# Altium PCB PCB1.PcbDoc (part 1 of 2)
Units mil, origin at the board's own origin, x right, y up, seen from the top; angles counter-clockwise.
Board outline 6000 x 4000 mil, 2 copper layers (Top Layer, Bottom Layer); 71 components, 119 nets, 504 pads, 94 vias.
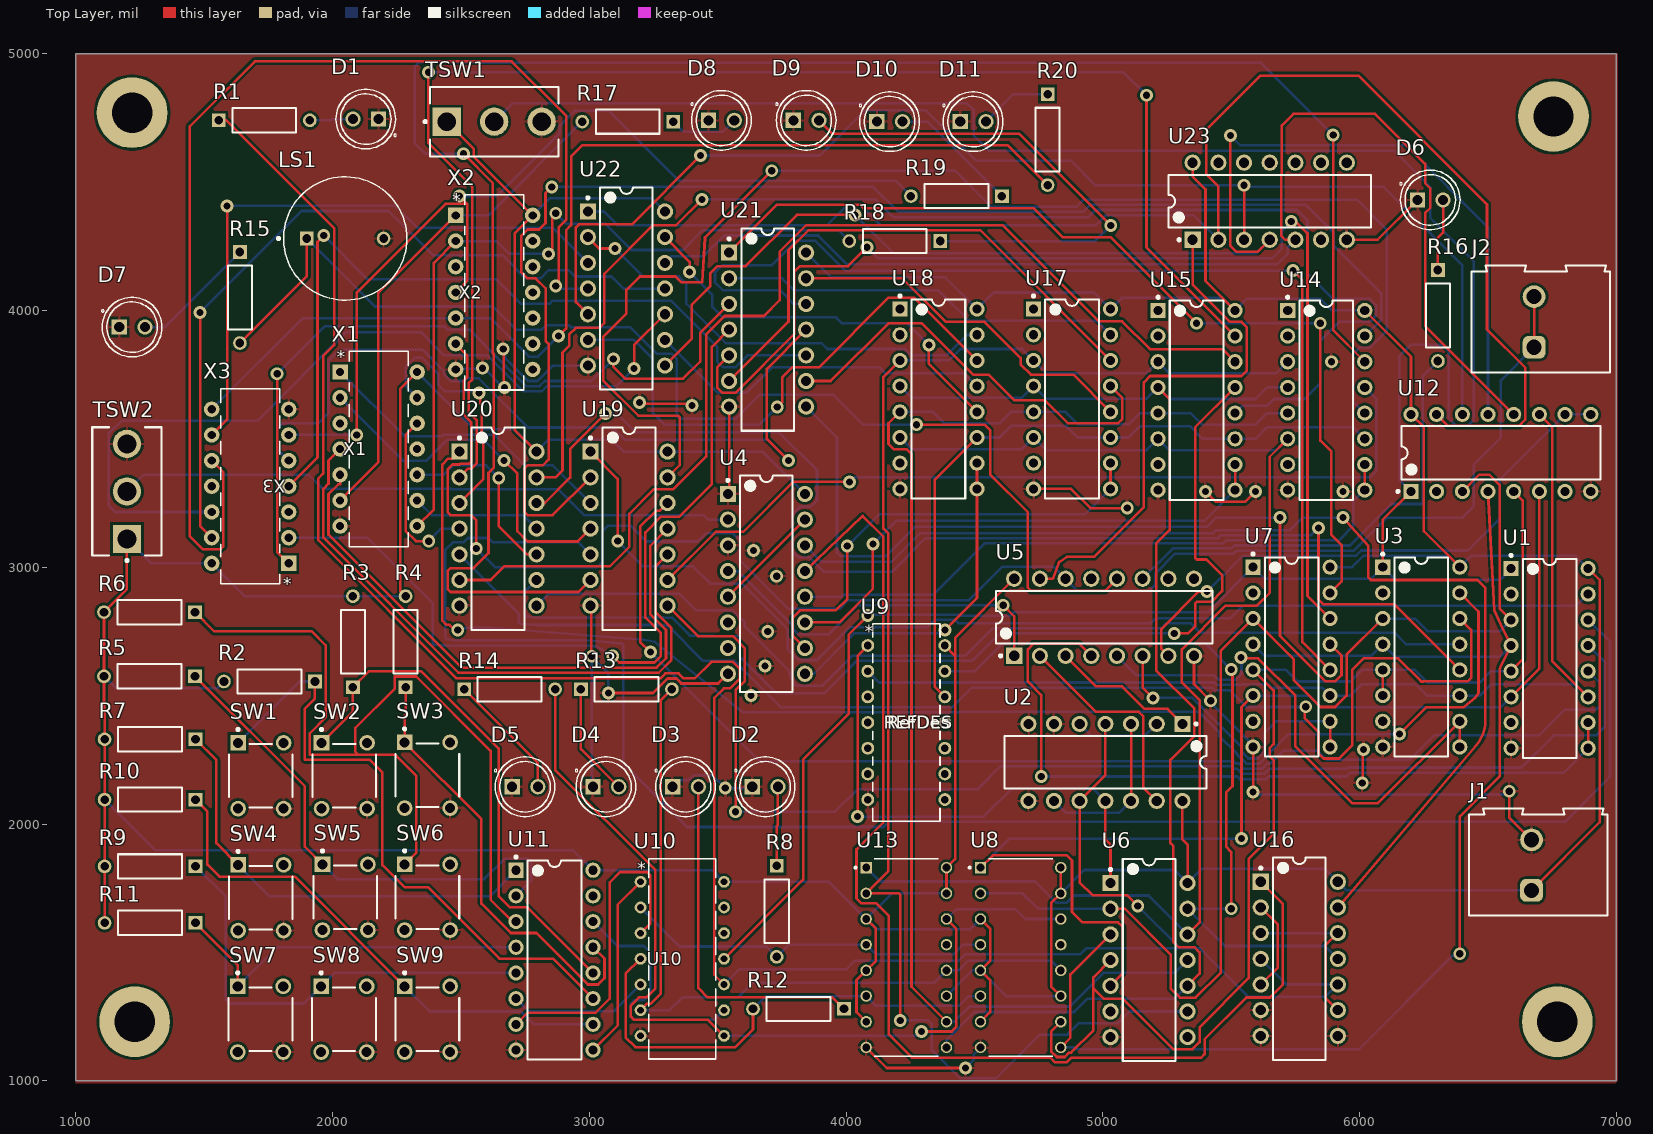
[diagram p0: Top Layer view]
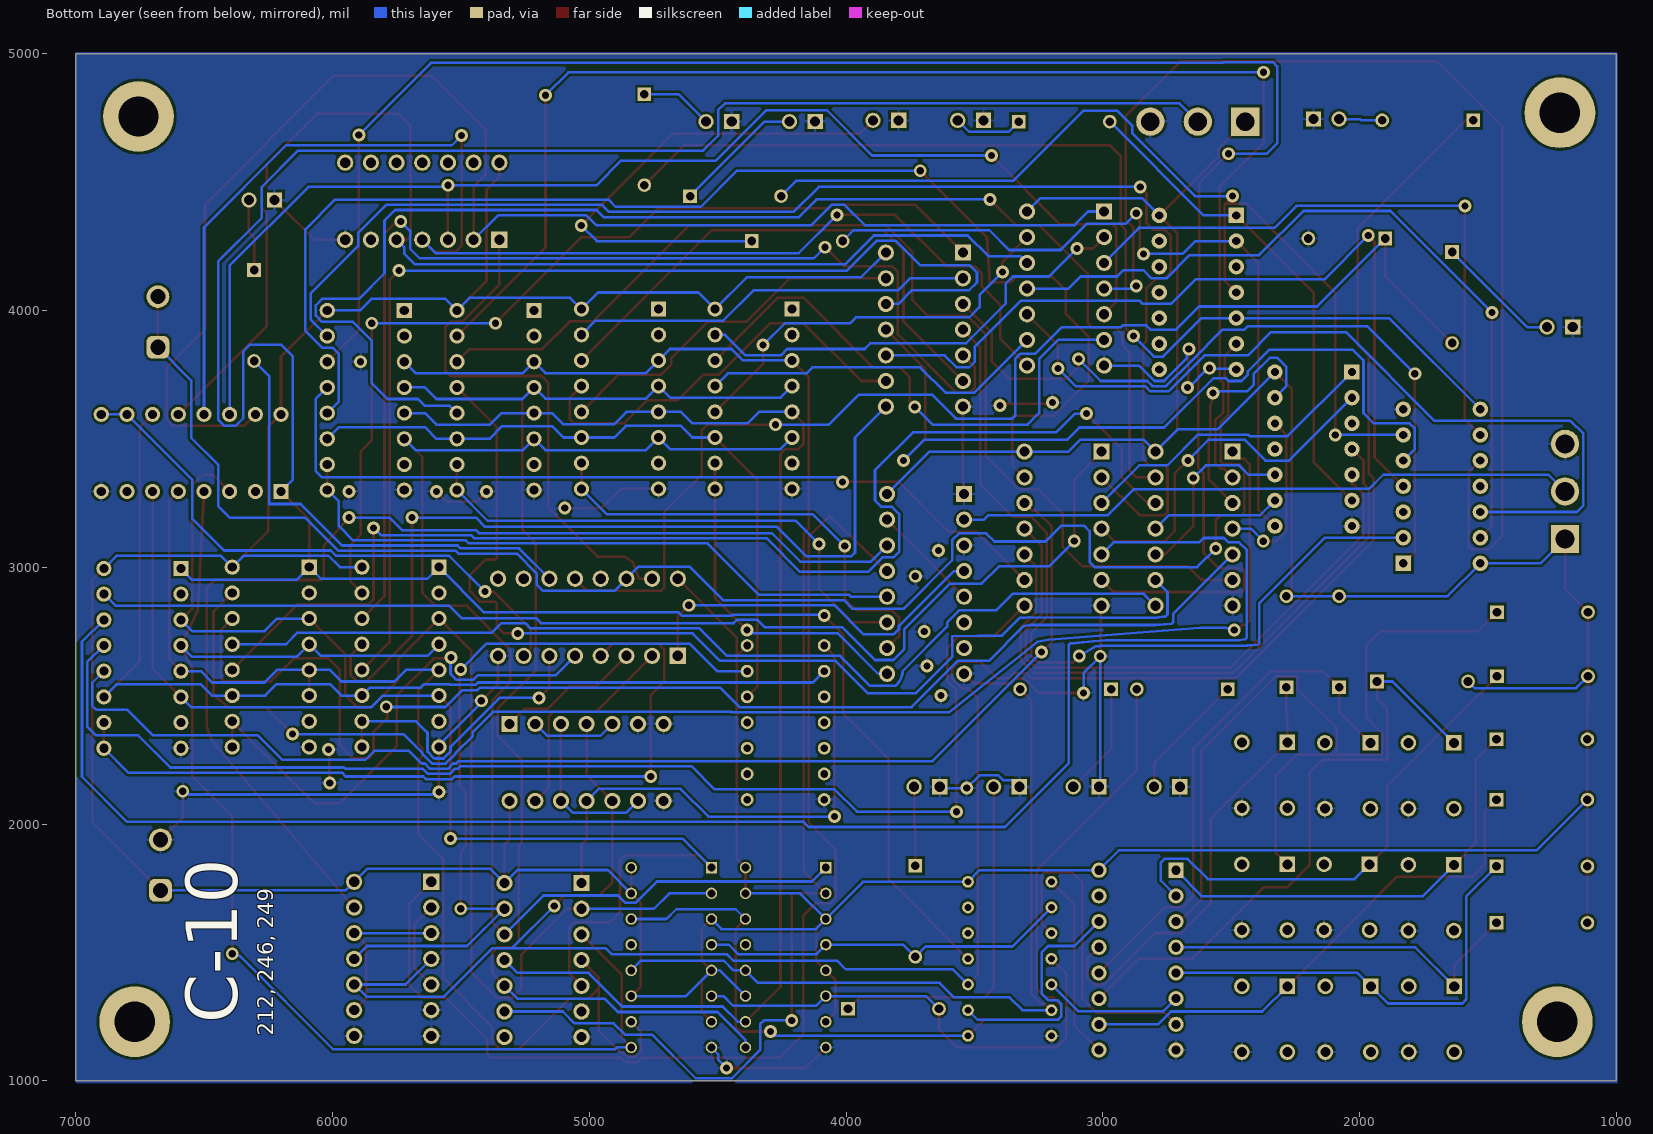
[diagram p1: Bottom Layer view, seen from below]

## Layer stack, top to bottom
Top Solder: solder mask 0.4, Solder Resist, Dk 3.5
Top Layer: signal copper 1.4
Dielectric 1: dielectric 12.6, FR-4, Dk 4.8
Bottom Layer: signal copper 1.4
Bottom Solder: solder mask 0.4, Solder Resist, Dk 3.5

## Board outline
1000,1000 7000,1000 7000,5000 1000,5000

## Design rules (kind name [scope] priority, off if disabled: settings)
Clearance [All] p1: gap=10 ignorepadtopadclearanceinfootprint=FALSE
PolygonConnect [All] p1: connectstyle=Relief reliefconductorwidth=10 reliefentries=4 polygonreliefangle="90 Angle" airgapwidth=10
RoutingVias [All] p1: holewidth=28 width=50 viastyle="Through Hole" minholewidth=28 minwidth=50 maxholewidth=28 maxwidth=50
SolderMaskExpansion [All] p1: expansion=4 istentingtop=FALSE
SupplyNets "Schematic Supply Nets_1" [InNet('+12')] p1: voltage=0.000
SupplyNets "Schematic Supply Nets" [InNet('GND')] p2: voltage=0.000
Width [All] p1: maxlimit=10 minlimit=10 preferedwidth=10
30 further rules are at their usual default settings.

## Components (designator, comment, footprint, x,y, rotation, side; value= is the part's Value field where it differs from the comment)
D1 "WP7113ID" LED_WP7113ID 2130,4745 r180 top
D2 "WP7113ID" LED_WP7113ID 3685,2145 r0 top
D3 "WP7113ID" LED_WP7113ID 3375,2145 r0 top
D4 "WP7113ID" LED_WP7113ID 3065,2145 r0 top
D5 "WP7113ID" LED_WP7113ID 2750,2145 r0 top
D6 "WP7113ID" LED_WP7113ID 6275,4430 r0 top
D7 "WP7113ID" LED_WP7113ID 1220,3935 r0 top
D8 "WP7113ID" LED_WP7113ID 3515,4740 r0 top
D9 "WP7113ID" LED_WP7113ID 3845,4740 r0 top
D10 "WP7113ID" LED_WP7113ID 4170,4735 r0 top
D11 "WP7113ID" LED_WP7113ID 4495,4735 r0 top
J1 "691211720002" 691211720002 6695,1840 r90 top
J2 "691211720002" 691211720002 6705,3955 r90 top
LS1 "AI-1223-TWT-3V-2-R" FP-AI-1223-TWT-3V-2-R-MFG 2050,4280 r0 top
R1 "MFR-25FBF52-1K" RESA60-630X240 1735,4740 r0 top
R2 "MFR-25FBF52-1K" RESA60-630X240 1755,2555 r180 top
R3 "MFR-25FBF52-1K" RESA60-630X240 2080,2710 r90 top
R4 "MFR-25FBF52-1K" RESA60-630X240 2285,2710 r90 top
R5 "MFR-25FBF52-1K" RESA60-630X240 1287.83,2575 r180 top
R6 "MFR-25FBF52-1K" RESA60-630X240 1287.83,2825 r180 top
R7 "MFR-25FBF52-1K" RESA60-630X240 1290,2330 r180 top
R8 "MFR-25FBF52-1K" RESA60-630X240 3730,1660 r270 top
R9 "MFR-25FBF52-1K" RESA60-630X240 1290,1835 r180 top
R10 "MFR-25FBF52-1K" RESA60-630X240 1290,2095 r180 top
R11 "MFR-25FBF52-1K" RESA60-630X240 1290,1615 r180 top
R12 "MFR-25FBF52-1K" RESA60-630X240 3815,1280 r180 top
R13 "MFR-25FBF52-1K" RESA60-630X240 3145,2525 r0 top
R14 "MFR-25FBF52-1K" RESA60-630X240 2690,2525 r0 top
R15 "MFR-25FBF52-1K" RESA60-630X240 1640,4050 r270 top
R16 "MFR-25FBF52-1K" RESA60-630X240 6305,3980 r270 top
R17 "MFR-25FBF52-1K" RESA60-630X240 3150,4735 r180 top
R18 "MFR-25FBF52-1K" RESA60-630X240 4190,4270 r180 top
R19 "MFR-25FBF52-1K" RESA60-630X240 4430,4445 r180 top
R20 "MFR-25FBF52-1K" RESA60-630X240 4785,4665 r270 top
SW1 "EVQ-PAG05R" FP-EVQ-PAG05R-MFG 1721.42,2187.95 r0 top
SW2 "EVQ-PAG05R" FP-EVQ-PAG05R-MFG 2046.42,2187.95 r0 top
SW3 "EVQ-PAG05R" FP-EVQ-PAG05R-MFG 2370,2190 r0 top
SW4 "EVQ-PAG05R" FP-EVQ-PAG05R-MFG 1721.42,1712.95 r0 top
SW5 "EVQ-PAG05R" FP-EVQ-PAG05R-MFG 2050,1715 r0 top
SW6 "EVQ-PAG05R" FP-EVQ-PAG05R-MFG 2370,1715 r0 top
SW7 "EVQ-PAG05R" FP-EVQ-PAG05R-MFG 1720,1240 r0 top
SW8 "EVQ-PAG05R" FP-EVQ-PAG05R-MFG 2045,1240 r0 top
SW9 "EVQ-PAG05R" FP-EVQ-PAG05R-MFG 2370,1240 r0 top
TSW1 "7101SD9CQE" FP-7101SD9CQE-MFG 2629.96,4735 r90 top
TSW2 "7101SD9CQE" FP-7101SD9CQE-MFG 1200,3294.96 r180 top
U1 "CD74HCT194E" N0016A 6740,2645 r0 top
U2 "CD4013BF" J0014A 5010,2240 r270 top
U3 "CD74HCT194E" N0016A 6240,2650 r0 top
U4 "CD4555BF3A" J0016A 3690,2935 r0 top
U5 "CD4555BF3A" J0016A 5005,2805 r90 top
U6 "CD4072BF3A" J0014A 5180,1470 r0 top
U7 "CD74HCT194E" N0016A 5735,2650 r0 top
U8 "CD4043BE" DIP794W45P254L1969H508Q16 4680,1480 r0 top
U9 "tc74hc07ap(f)" DIP14_TOS 4085,2695 r0 top
U10 "MM74HC04N" PDIP14_19P56X6P35_ONS 3200,1775 r0 top
U11 "CD74HCT147E" N0016A 2865,1470 r0 top
U12 "CD74HCT194E" N0016A 6550,3445 r90 top
U13 "CD4043BE" DIP794W45P254L1969H508Q16 4235,1480 r0 top
U14 "CD74HCT194E" N0016A 5870,3650 r0 top
U15 "CD74HCT194E" N0016A 5365,3650 r0 top
U16 "CD4013BF" J0014A 5765,1475 r0 top
U17 "CD74HCT194E" N0016A 4880,3655 r0 top
U18 "CD74HCT194E" N0016A 4360,3655 r0 top
U19 "CD4077BF" J0014A 3155,3150 r0 top
U20 "CD4077BF" J0014A 2645,3150 r0 top
U21 "CD4077BF" J0014A 3695,3925 r0 top
U22 "CD4077BF" J0014A 3145,4085 r0 top
U23 "CD4002BF3A" J0014A 5650,4425 r90 top
X1 "M74HC21B1R" DIP14_300_STH 2030,3760 r0 top
X2 "M74HC21B1R" DIP14_300_STH 2480,4370 r0 top
X3 "M74HC21B1R" DIP14_300_STH 1830,3015 r180 top

## Footprints (in the part's own frame and the unit in brackets; to place one, negate y for a bottom-side part, rotate by r counter-clockwise, add the part's x,y. Pads: shape width x height; smd on the part's side, far side on the other; paste and mask are expansions set on the pad)
691211720002 [mm] "5,00mm - modular - green -45¡ã entry with rising cage clamp - 02p"
  rrect50% 2.25x2.25 hole 1.5: 1(-2.5,0.65)
  round 2.25 hole 1.5: 2(2.5,0.65)
  silkscreen extent -5,-6.85 5.6,6.85, body extent -5,-6.85 5.6,6.85, height 15.72
DIP14_300_STH [mil]
  rect 60x60 hole 32 paste-99999 mask+0: 1(0,0)
  round 60 hole 32 paste-99999 mask+0: 2(0,-100) 3(0,-200) 4(0,-300) 5(0,-400) 6(0,-500) 7(0,-600) 8(300,-600) 9(300,-500) 10(300,-400) 11(300,-300) 12(300,-200) 13(300,-100) 14(300,0)
  silkscreen extent 35,-680 265,80, body extent -5,-675 315,75, height 205
DIP14_TOS [mil]
  round 50 / inner round 60 / far side round 50 hole 30 paste-99999 mask+0: 1(0,0) 2(0,-100) 3(0,-200) 4(0,-300) 5(0,-400) 6(0,-500) 7(0,-600) 8(300,-600) 9(300,-500) 10(300,-400) 11(300,-300) 12(300,-200) 13(300,-100) 14(300,0)
  silkscreen extent 19,-684 281,84, body extent -5,-679 315,79, height 171
DIP794W45P254L1969H508Q16 [mm]
  rect 1.13x1.13 / inner round 1.13 / far side rect 1.13x1.13 hole 0.78 mask+0.102: 1(-3.97,8.89)
  round 1.13 hole 0.78 mask+0.102: 2(-3.97,6.35) 3(-3.97,3.81) 4(-3.97,1.27) 5(-3.97,-1.27) 6(-3.97,-3.81) 7(-3.97,-6.35) 8(-3.97,-8.89) 9(3.97,-8.89) 10(3.97,-6.35) 11(3.97,-3.81) 12(3.97,-1.27) 13(3.97,1.27) 14(3.97,3.81) 15(3.97,6.35) 16(3.97,8.89)
  silkscreen extent -5.13,-9.77 3.17,9.77, body extent -4.15,-9.65 4.15,9.65, height 5.08
FP-7101SD9CQE-MFG [mm]
  rect 2.8x2.8 hole 1.85 paste-2539.97 mask+0: 1(0,4.7)
  round 2.8 hole 1.85 paste-2539.97 mask+0: 2(0,0) 3(0,-4.7)
  silkscreen extent -3.43,-6.35 3.43,6.95, body extent -3.53,-6.45 3.53,6.45, height 0.25
FP-AI-1223-TWT-3V-2-R-MFG [mm]
  rect 1.35x1.35 hole 0.85 paste-2539.97 mask+0: 1(-3.8,0)
  round 1.35 hole 0.85 paste-2539.97 mask+0: 2(3.8,0)
  silkscreen extent -6.72,-6.1 6.1,6.1, body extent -6.2,-6.2 6.2,6.2, height 0.25
FP-EVQ-PAG05R-MFG [mm]
  rect 1.55x1.55 hole 1 paste-2539.97 mask+0: A(-2.25,3.25)
  round 1.55 hole 1 paste-2539.97 mask+0: A'(-2.25,-3.25) B(2.25,3.25) B'(2.25,-3.25)
  silkscreen extent -3.15,-3.15 3.15,4.7, body extent -3.25,-4.13 3.25,4.13, height 0.25
J0014A [mm] "DIP, 14-Leads, Body 19.95x7.2mm, Pitch 2.54mm"
  rect 1.6x1.6 hole 1: 1(-3.81,7.62)
  round 1.6 hole 1: 2(-3.81,5.08) 3(-3.81,2.54) 4(-3.81,0) 5(-3.81,-2.54) 6(-3.81,-5.08) 7(-3.81,-7.62) 8(3.81,-7.62) 9(3.81,-5.08) 10(3.81,-2.54) 11(3.81,0) 12(3.81,2.54) 13(3.81,5.08) 14(3.81,7.62)
  silkscreen extent -3.93,-10 2.6,10, body extent -3.96,-9.97 3.96,9.97, height 5.08
J0016A [mm] "DIP, 16-Leads, Body 21.35x7.2mm, Pitch 2.54mm"
  rect 1.6x1.6 hole 1: 1(-3.81,8.89)
  round 1.6 hole 1: 2(-3.81,6.35) 3(-3.81,3.81) 4(-3.81,1.27) 5(-3.81,-1.27) 6(-3.81,-3.81) 7(-3.81,-6.35) 8(-3.81,-8.89) 9(3.81,-8.89) 10(3.81,-6.35) 11(3.81,-3.81) 12(3.81,-1.27) 13(3.81,1.27) 14(3.81,3.81) 15(3.81,6.35) 16(3.81,8.89)
  silkscreen extent -3.93,-10.7 2.6,10.7, body extent -3.96,-10.68 3.96,10.68, height 5.08
LED_WP7113ID [mm]
  round 1.508 hole 1: A(1.27,0)
  rect 1.508x1.508 / inner round 1.508 / far side rect 1.508x1.508 hole 1: C(-1.27,0)
  silkscreen extent -3.03,-2.95 2.95,2.95, body extent -2.5,-2.95 2.95,2.95, height 9.6
N0016A [mm] "DIP, 16-Leads, Body 19.7x6.6mm, Pitch 2.54mm"
  rect 1.5x1.5 hole 0.9: 1(-3.81,8.89)
  round 1.5 hole 0.9: 2(-3.81,6.35) 3(-3.81,3.81) 4(-3.81,1.27) 5(-3.81,-1.27) 6(-3.81,-3.81) 7(-3.81,-6.35) 8(-3.81,-8.89) 9(3.81,-8.89) 10(3.81,-6.35) 11(3.81,-3.81) 12(3.81,-1.27) 13(3.81,1.27) 14(3.81,3.81) 15(3.81,6.35) 16(3.81,8.89)
  silkscreen extent -3.93,-9.85 2.65,10.31, body extent -3.95,-9.85 3.95,9.85, height 5.08
PDIP14_19P56X6P35_ONS [mil]
  round 46 hole 26 paste-99999 mask+0: 1(0,0) 2(0,-100) 3(0,-200) 4(0,-300) 5(0,-400) 6(0,-500) 7(0,-600) 8(325,-600) 9(325,-500) 10(325,-400) 11(325,-300) 12(325,-200) 13(325,-100) 14(325,0)
  silkscreen extent 32,-690 292,90, body extent -5,-685 340,85, height 150
RESA60-630X240 [mm] "Axial Resistor, 2-Leads, Dia 2.4mm, Body Length 6.3mm"
  rect 1.35x1.35 hole 0.85: 1(-4.5,0)
  round 1.35 hole 0.85: 2(4.5,0)
  silkscreen extent -3.15,-1.2 3.15,1.2, body extent -3.15,-1.2 3.15,1.2, height 2.4

## Part data
D1 D2 D3 D4 D5 D6 D7 D8 D9 D10 D11: "Red 617nm LED Indication - Discrete 2V Radial", Package="Radial Kingbright", Availability="In Stock", Check_prices=https://www.snapeda.com/parts/WP7113ID/Kingbright/view-part/?ref=eda, MF=Kingbright, MP=WP7113ID, Price=None, Purchase-URL=https://pricing.snapeda.com/search/part/WP7113ID/?ref=eda, SnapEDA_Link=https://www.snapeda.com/parts/WP7113ID/Kingbright/view-part/?ref=snap
J1 J2: library part CMP-1502-02524-3, "211 Series 5MM Pitch Straight, Pcb Terminal Block, Through Hole, 2 Way", Color=Green, Current=10A, Max Operating Temperature=105°C, Min Operating Temperature=-40°C, Voltage=300V, Connector Type="PCB, Terminal Block", Contact Material=Brass, Contact Plating=Tin, Height=15.5mm, Housing Material=Nylon, Lead Pitch=5mm, Length=13.7mm, Mount="Through Hole", Number of Contacts=2, Number of Levels=1, Number of Pins=2, Number of Positions Per Level=2, Packaging=Box, Pitch=5.0038mm, Plating="Brass, Steel", REACH SVHC=Unknown, RoHS=Compliant, Stripping Length=-7mm, Termination=Screw, Width=10mm, Wire Gauge (Max)=24AWG, Wire Gauge (Min)=12AWG, Wire/Cable Gauge=12AWG
LS1: library part CMP-103888-000003-1, "BUZZER MAGNETIC 3V 12MM TH", Frequency=2.3kHz, Max Operating Temperature=70°C, Max Supply Current=30mA, Max Supply Voltage (DC)=4V, Min Operating Temperature=-20°C, Min Supply Voltage (DC)=2V, Nominal Supply Voltage (DC)=3V, Contact Plating=Tin, Diameter=12mm, Height=7.5mm, Input Type=DC, Mount="Through Hole", Operating Supply Current=30mA, Packaging=Tray, Sensing Method=Magnetic, Series=AI, Termination="PC Pins", Voltage Rating=3V
R1 R2 R3 R4 R5 R6 R7 R8 R9 R10 R11 R12 R13 R14 R15 R16 R17 R18 R19 R20: library part CMP-1659-00075-1, "Axial Resistor, 1 KOhm, +/- 1%, 250 mW, -55 to 155 degC, 2-Pin THD, RoHS, Bulk", Case\Package=Axial, Max Operating Temperature="155 degC", Min Operating Temperature="-55 degC", Package Quantity=200, Power Rating="250 mW", Resistance="10 kohm", Tolerance=1%, Voltage Rating="250 V", ComponentLink1Description="Manufacturer URL", ComponentLink1URL=http://www.yageo.com/, ComponentLink2Description=Datasheet, ComponentLink2URL=http://www.yageo.com/documents/recent/Yageo%20LR_MFR_2013.pdf, DatasheetVersion=Apr-13, Length="0.248 inch", PackageDescription="2-Pin Axial Lead, Dia 2.4 mm, Body Length 6.3 mm", PackageReference=MFR-25, Packaging=Bulk, RoHSCompliant=true
SW1 SW2 SW3 SW4 SW5 SW6 SW7 SW8 SW9: library part CMP-05618-000039-1, "SWITCH TACTILE SPST-NO 0.02A 15V", Actuator Color=Red, Contact Current Rating=20mA, Contact Resistance=50mR, Max Operating Temperature=70°C, Max Voltage Rating (DC)=15V, Min Operating Temperature=-20°C, Operating Force=2.6N, Package Quantity=500, Actuator Length=1.6mm, Actuator Type=Standard, Contact Plating=Silver, Current Rating=20mA, Depth=6.5mm, Electrical Life=50000Cycles, Height=5mm, Illumination Type=Non-Illuminated, Lead Free="Lead Free", Length=6mm, Max Current Rating=20mA, Mechanical Life=50000Cycles, Mount="Through Hole", Orientation=Straight, Packaging=Bulk, Radiation Hardening=No, REACH SVHC="No SVHC", RoHS Compliant=Yes, Series=EVQPA, Size=6mm, Switch Function=Off-Mom, Switch Travel=0.25mm, Termination="PC Pin", Throw Configuration=SPST, Voltage Rating (DC)=15V, Width=6mm
TSW1 TSW2: library part CMP-01151-55410166-1, "7101SD9CQE Toggle Switch, Spdt, On-On, Maintained, 5A, 28Vdc, 3 Pcb Hole Cnt, Solder Terminal, Toggle", Contact Current Rating=5A, Contact Resistance=10mΩ, Max Operating Temperature=85°C, Max Voltage Rating (AC)=250V, Max Voltage Rating (DC)=28V, Min Operating Temperature=-30°C, Voltage Rating (AC)=120V, Actuator Length=12.45mm, Actuator Material="Brass, Chrome", Contact Material=Silver, Contact Plating=Silver, Current Rating=5A, Depth=6.86mm, Electrical Life=100kcycles, Housing Material="Stainless Steel", Illumination Type="Illuminated, Non-Illuminated", Lead Free="Lead Free", Length=12.7mm, Life (Cycles)=100kcycles, Max Current Rating=5A, Mount="Through Hole", NexarPartId=55410166, Orientation=Straight, Radiation Hardening=No, RoHS=Compliant, Switch Function=On-On, Termination="PC Pins", Throw Configuration=SPDT, Voltage Rating (DC)=28V
U1 U3 U7 U12 U14 U15 U17 U18: library part CMP-0807-00167-3, "High Speed CMOS Logic 4-Bit Bidirectional Universal Shift Register, N0016A, TUBE", F @ Nom Voltage(Max)(Mhz)=25, Generic Part Number=CD74HCT194, ICC @ Nom Voltage(Max)(mA)=0.08, Manufacturer="Texas Instruments", Operating Temperature Range(C)="-55 to 125", Rating=Catalog, tpd @ Nom Voltage(Max)(ns)=46, Voltage(Nom)(V)=5, 3-State Output=No, Bits=8, Code_JEDEC=MS-001, DatasheetVersion=SCHS164G, Input Type=TTL, Output Drive (IOL/IOH)(Max)(mA)=4/-4, Output Type=CMOS, PackageReference=N0016A, PackageVersion=http://www.ti.com/lit/ml/mpdi002c/mpdi002c.pdf, Technology Family=HCT, VCC(Max)(V)=5.5, VCC(Min)(V)=4.5
U2 U16: library part CMP-1616-00070-3, "CMOS Dual D-Type Flip Flop, J0014A, TUBE", F @ Nom Voltage(Max)(Mhz)=8, Generic Part Number=CD4013B-MIL, ICC @ Nom Voltage(Max)(mA)=0.06, Manufacturer="Texas Instruments", Operating Temperature Range(C)="-55 to 125", Rating=Military, tpd @ Nom Voltage(Max)(ns)=130, Voltage(Nom)(V)=10, 3-State Output=No, Bits(#)=2, DatasheetVersion=SCHS023D, Input Type=CMOS, Output Drive (IOL/IOH)(Max)(mA)=1.5/-1.5, Output Logic=Inverted,Non-inverted, Output Type=CMOS, PackageReference=J0014A, Schmitt Trigger=No, Technology Family=CD4000, VCC(Max)(V)=18, VCC(Min)(V)=3
U4 U5: library part CMP-1633-00451-2, "CMOS Dual Binary to 1-of-4 Decoder/Demultiplexer with Outputs High on Select, J0016A, TUBE", F @ Nom Voltage(Max)(Mhz)=8, Generic Part Number=CD4555B-MIL, ICC @ Nom Voltage(Max)(mA)=0.3, Manufacturer="Texas Instruments", Operating Temperature Range(C)="-55 to 125", Rating=Military, tpd @ Nom Voltage(Max)(ns)=190, Voltage(Nom)(V)=10, Channels(#)=2, DatasheetVersion=SCHS087D, Input Type=CMOS, Output Drive (IOL/IOH)(Max)(mA)=1.5/-1.5, Output Type=CMOS, PackageReference=J0016A, Schmitt Trigger=No, Technology Family=CD4000, VCC(Max)(V)=18, VCC(Min)(V)=3
U6: library part CMP-1573-00121-3, "CMOS Dual 4-Input OR Gate, J0014A, TUBE", F @ Nom Voltage(Max)(Mhz)=8, Generic Part Number=CD4072B-MIL, ICC @ Nom Voltage(Max)(mA)=0.015, Manufacturer="Texas Instruments", Operating Temperature Range(C)="-55 to 125", Rating=Military, tpd @ Nom Voltage(Max)(ns)=250, Voltage(Nom)(V)=10, Bits(#)=2, DatasheetVersion=SCHS056D, Input Type=CMOS, Output Drive (IOL/IOH)(Max)(mA)=1.5/-1.5, Output Type=CMOS, PackageReference=J0014A, PackageVersion=http://www.ti.com/lit/ml/mcer002d/mcer002d.pdf, VCC(Max)(V)=18, VCC(Min)(V)=3
U8 U13: "CMOS Quad NOR R/S Latch with 3-State Outputs", Package="PDIP-16 Texas Instruments", Check_prices=https://www.snapeda.com/parts/CD4043BE/Texas+Instruments/view-part/?ref=eda, MF="Texas Instruments", MP=CD4043BE, SnapEDA_Link=https://www.snapeda.com/parts/CD4043BE/Texas+Instruments/view-part/?ref=snap
U9: library part tc74hc07apf, "Hex Buffer, DIP14", Manufacturer_Name="Toshiba Electronic Devices & Storage Corp.", Number_devices_in_Package=1, Source_Package=TC74HC07AP, Copyright="Copyright (C) 2025 Ultra Librarian. All rights reserved.", Manufacturer_Part_Number=tc74hc07ap(f), RefDes=Refdes, Type=Type
U10: "Description", Manufacturer_Name=onsemi, Copyright="Copyright (C) 2026 Ultra Librarian. All rights reserved.", Manufacturer_Part_Number=MM74HC04N, RefDes=RefDes, Type=Type
U11: library part CMP-1633-00685-2, "High Speed CMOS Logic 10-to-4 Line Priority Encoder, N0016A, TUBE", F @ Nom Voltage(Max)(Mhz)=25, Generic Part Number=CD74HCT147, ICC @ Nom Voltage(Max)(mA)=0.08, Manufacturer="Texas Instruments", Operating Temperature Range(C)="-55 to 125", Rating=Catalog, tpd @ Nom Voltage(Max)(ns)=35, Voltage(Nom)(V)=5, Bits(#)=10, Channels(#)=1, Code_JEDEC=MS-001, Configuration=10：4, DatasheetVersion=SCHS149F, Function=Encoder/Multiplexer, Input Type=TTL, Output Drive (IOL/IOH)(Max)(mA)=4/-4, Output Type=CMOS, PackageReference=N0016A, Schmitt Trigger=No, Technology Family=HCT, Type=Standard, VCC(Max)(V)=5.5, VCC(Min)(V)=4.5
U19 U20 U21 U22: library part CMP-1579-00012-3, "CMOS Quad Exclusive-NOR Gate, J0014A, TUBE", F @ Nom Voltage(Max)(Mhz)=9, Generic Part Number=CD4077B-MIL, ICC @ Nom Voltage(Max)(mA)=0.015, Manufacturer="Texas Instruments", Operating Temperature Range(C)="-55 to 125", Rating=Military, tpd @ Nom Voltage(Max)(ns)=130, Voltage(Nom)(V)=10, Bits(#)=4, DatasheetVersion=SCHS055E, Input Type=CMOS, Output Drive(mA)=-6.8/6.8, Output Type=CMOS, PackageReference=J0014A, Schmitt Trigger=No, Technology Family=CD4000, VCC(Max)(V)=18, VCC(Min)(V)=3
U23: library part CMP-0806-00145-3, "CMOS Dual 4-Input NOR Gate, J0014A, TUBE", F @ Nom Voltage(Max)(Mhz)=8, Generic Part Number=CD4002B-MIL, ICC @ Nom Voltage(Max)(mA)=0.015, Manufacturer="Texas Instruments", Operating Temperature Range(C)="-55 to 125", Rating=Military, tpd @ Nom Voltage(Max)(ns)=250, Voltage(Nom)(V)=10, Bits(#)=2, DatasheetVersion=SCHS015C, Input Type=CMOS, Output Drive (IOL/IOH)(Max)(mA)=1.5/-1.5, Output Type=CMOS, PackageReference=J0014A, PackageVersion=http://www.ti.com/lit/ml/mcer002d/mcer002d.pdf, VCC(Max)(V)=18, VCC(Min)(V)=3
X1 X2 X3: "No Description Available", Manufacturer_Name=STMicroelectronics, Copyright="Copyright (C) 2026 Ultra Librarian. All rights reserved.", Manufacturer_Part_Number=M74HC21B1R, RefDes=RefDes, Type=Type

## Free pads (board coordinates)
  round 275.59 hole 157.48: 2(1220,4770) 2(1230,1230) 2(6755,4755) 2(6770,1230)

## Via types
v1: diameter 50, hole 28, Top Layer to Bottom Layer, 94 vias

## Nets (pads, with @x,y where several pads share a name; then routed paths per layer and width w, separated by ;. In a path a pad name is that pad's centre, name@x,y a point inside that pad or via, vN(x,y) a via of type N, cw(c..) or ccw(c..) an arc to the next point about the centre after c; other vN are vias at no path point)
+12: J1.1 R2.2 R3.2 R4.2 R5.2 R6.2 R7.2 R9.2 R10.2 R11.2 TSW1.1 TSW2.1 U1.16 U2.14 U3.16 U4.16 U5.16 U6.14 U7.16 U8.3 U8.5 U8.7 U8.11 U8.15 U8.16 U9.14 U10.14 U11.16 U12.16 U13.3 U13.5 U13.7 U13.11 U13.15 U13.16 U14.16 U15.16 U16.14 U17.16 U18.16 U19.14 U20.14 U21.14 U22.14 U23.14 X1.14 X2.14 X3.14 | length 24208.8
  Top Layer w10: R11.2@1112.83,1615 R9.2@1112.83,1835 R10.2@1112.83,2095 R7.2@1112.83,2330 1112.83,2451 1110.67,2453.16 R5.2@1110.67,2575 R6.2@1110.67,2825 1200,2914.33 TSW2.1@1200,3109.92 ; R4.2@2285,2887.17 2265,2907.17 2265,3695 X1.14@2330,3760 ; TSW1.1@2444.92,4735 2550,4629.92 2550,4600 X2.14@2780,4370 2710,4300 2710,3535 U20.14@2795,3450 ; U13.7@4078.7,1230 4041,1267.7 4041,1392.3 U13.5@4078.7,1430 4116,1467.3 4116,1592.7 U13.3@4078.7,1630 ; U9.14@4385,2695 4425,2655 ; U13.15@4391.3,1730 U13.16@4391.3,1830 4425,1863.7 4425,2655 ; U8.7@4523.7,1230 4561,1267.3 4561,1392.7 U8.5@4523.7,1430 4561,1467.3 4561,1592.7 U8.3@4523.7,1630 ; U5.16@4655,2955 4425,2725 4425,2655 ; U8.11@4836.3,1330 4799,1367.3 4799,1692.7 U8.15@4836.3,1730 U8.16@4836.3,1830 ; U2.14@5310,2090 5310,1940 5330,1920 U6.14@5330,1770 ; U23.14@5350,4575 5350,4521.5 5400,4471.5 5400,4115 U15.16@5515,4000 ; U14.16@6020,4000 6200,3820 U12.16@6200,3595 6250,3545 6250,3140 U3.16@6390,3000 ; J1.1@6669.41,1741.58 6935,2007.17 6935,2950 U1.16@6890,2995
  Bottom Layer w10: R5.2@1110.67,2575 1156.67,2529 1551.83,2529 R2.2@1577.83,2555 ; R10.2@1112.83,2095 1310.83,1897 2938,1897 U11.16@3015,1820 3480,1820 U10.14@3525,1775 3933.7,1775 U13.3@4078.7,1630 ; TSW2.1@1200,3109.92 1294.92,3015 X3.14@1530,3015 1657.83,2887.17 R3.2@2080,2887.17 R4.2@2285,2887.17 ; X1.14@2330,3760 2553.5,3536.5 2708.5,3536.5 U20.14@2795,3450 2842,3497 3087.31,3497 3134.31,3450 U19.14@3305,3450 3675,3450 U4.16@3840,3285 ; X2.14@2780,4370 2846,4436 3244,4436 U22.14@3295,4385 ; U21.14@3845,4225 3941,4129 4386,4129 U18.16@4510,4005 4574.53,4069.53 4965.47,4069.53 U17.16@5030,4005 5074,4049 5466,4049 U15.16@5515,4000 5560,4045 5848,4045 5893,4000 U14.16@6020,4000 ; U13.11@4391.3,1330 4491.3,1430 U8.5@4523.7,1430 4623.7,1330 U8.11@4836.3,1330 ; U13.15@4391.3,1730 4178.7,1730 U13.3@4078.7,1630 ; U8.3@4523.7,1630 4484.7,1591 4117.7,1591 U13.3@4078.7,1630 ; U8.15@4836.3,1730 4927.3,1821 5279,1821 U6.14@5330,1770 5386,1826 5864,1826 U16.14@5915,1775 5948.42,1741.58 J1.1@6669.41,1741.58 ; U7.16@5885,3000 5971.01,3000 6016.01,3045 6345,3045 U3.16@6390,3000 6434,3044 6841,3044 U1.16@6890,2995
GND: D1.C D2.C D3.C D4.C D5.C D6.C D7.C D8.C D9.C D10.C D11.C J1.2 LS1.2 SW1.B' SW2.B' SW3.B' SW4.B' SW5.B' SW6.B' SW7.B' SW8.B' SW9.B' TSW1.3 TSW2.3 U1.8 U2.6 U2.7 U2.8 U3.8 U4.1 U4.3 U4.8 U5.8 U6.7 U7.8 U8.8 U9.7 U10.7 U11.8 U12.8 U13.8 U14.8 U15.8 U16.6 U16.7 U16.8 U17.8 U18.8 U19.7 U20.7 U21.7 U22.7 U23.7 X1.7 X2.7 X3.7 | length 6569.7
  Top Layer w10: v1(2665,3850) 2667.5,3847.5 2667.5,3702.5 v1(2670,3700) ; U19.7@3005,2850 3007.5,2847.5 3007.5,2655.63 v1(3010,2653.13) ; v1(3075,2510) 3248.37,2510 3304.95,2566.57 3339.39,2566.57 3358.96,2547 3502,2547 U4.8@3540,2585 ; v1(3196.28,3641.28) 3201.93,3635.64 3394.36,3635.64 v1(3400,3630) ; U4.1@3540,3285 3545,3290 U21.7@3545,3625 ; U13.8@4078.7,1130 4158.7,1050 v1(4465,1050) ; U17.8@4730,3305 4876.23,3305 4951.23,3230 v1(5095,3230) ; U5.8@5355,2655 5355,2545 v1(5420,2480) ; v1(5400,3295) 5439.53,3255.47 5555.47,3255.47 v1(5595,3295) ; v1(5585,2125) U7.8@5585,2300 ; U23.7@5950,4275 6070,4275 D6.C@6225,4430 ; v1(6010,2160) 6012.5,2162.5 6012.5,2287.5 v1(6015,2290) ; v1(6582.5,2127.5) 6582.5,2025.34 J1.2@6669.41,1938.43
  Bottom Layer w10: X2.7@2480,3770 2482.5,3772.5 2582.5,3772.5 v1(2585,3775) 2590,3775 2665,3700 v1(2670,3700) ; v1(2665,3850) 2672.65,3842.35 2672.65,3813.71 2761.36,3725 2798.64,3725 2858.64,3785 U22.7@2995,3785 ; D4.C@3015,2145 3010,2169.69 v1(3010,2653.13) 3075,2588.13 v1(3075,2510) ; D3.C@3325,2145 3349.69,2169.69 3386.49,2169.69 3406.49,2189.69 3480.31,2189.69 v1(3530,2140) 3630,2140 D2.C@3635,2145 ; v1(4465,1050) 4497.58,1082.58 4497.58,1103.45 4523.7,1129.56 U8.8@4523.7,1130 ; v1(5420,2480) 5420,2472.5 5585,2307.5 U7.8@5585,2300 ; v1(5585,2125) 5592.65,2117.35 5608.51,2117.35 5610.86,2115 6559.18,2115 6574.18,2130 v1@6585,2130
  other v1: 3630,2500 3685,2615 3695,2750 3730,2965 3640,3065 5935,3295 5890,3800
NetD1_A: D1.A R1.2 | length 169.9
  Bottom Layer w10: R1.2@1912.17,4740 1993,4740 1998,4745 D1.A@2080,4745
NetD2_A: D2.A R8.1 | length 309.9
  Top Layer w10: R8.1@3730,1837.17 3730,1992 3735,1997 D2.A@3735,2145
NetD3_A: D3.A R12.1 | length 1384.7
  Top Layer w10: D3.A@3425,2145 3425,1361 3461,1325 3947.17,1325 R12.1@3992.17,1280
NetD4_A: D4.A R13.1 | length 441
  Top Layer w10: R13.1@2967.83,2525 2967.83,2292.17 D4.A@3115,2145
NetD5_A: D5.A R14.1 | length 498.9
  Top Layer w10: R14.1@2512.83,2525 2800,2237.83 D5.A@2800,2145
NetD6_A: D6.A R16.1 | length 281.1
  Top Layer w10: R16.1@6305,4157.17 6305,4283 6325,4303 D6.A@6325,4430
NetD7_A: D7.A R15.1 | length 491
  Bottom Layer w10: D7.A@1270,3935 1347.83,3935 R15.1@1640,4227.17
NetD8_A: D8.A R17.1 | length 273
  Bottom Layer w10: R17.1@3327.17,4735 3367.17,4695 3520,4695 D8.A@3565,4740
NetD9_A: D9.A R18.1 | length 1994.5
  Top Layer w10: D9.A@3895,4740 3948,4687 4675,4687 v1(5031,4331)
  Bottom Layer w10: R18.1@4367.17,4270 4970,4270 v1(5031,4331)
NetD10_A: D10.A R19.1 | length 507.3
  Bottom Layer w10: D10.A@4220,4735 4317.17,4735 R19.1@4607.17,4445
NetD11_A: D11.A R20.1 | length 284.4
  Bottom Layer w10: D11.A@4545,4735 4652.17,4842.17 R20.1@4785,4842.17
NetJ2_1: J2.1 J2.2 U5.14 X2.6 | length 6441.3
  Top Layer w10: X2.6@2480,3870 2525,3825 2525,3739.31 2510.72,3725.02 2510.72,3594.93 2541.5,3564.15 2541.5,3412.29 2532.71,3403.5 2498.5,3403.5 2495,3400 2468.5,3400 2448.5,3380 2448.5,3214.5 2460,3203 2540,3203 2560,3183 v1(2560,3073) ; J2.1@6679.41,3856.58 J2.2@6679.41,4053.43
  Bottom Layer w10: v1(2560,3073) 2633,3000 3031.5,3000 3051.5,3020 3051.5,3140 3073,3161.5 3161.5,3161.5 3223,3100 3422,3100 3454,3132 3560,3132 3587,3105 3587,3027 3776,2838 3974,2838 4008,2872 4479,2872 4609,3002 4808,3002 U5.14@4855,2955 4902,2908 5180,2908 5205,2933 5205,2976 5282,3053 5508.94,3053 5520.47,3064.53 5977.53,3064.53 6106,3193 6400,3193 6445,3238 6445,3399 6550,3504 6550,3727.17 J2.1@6679.41,3856.58
NetLS1_1: LS1.1 R15.2 U5.12 | length 4751.3
  Top Layer w10: R15.2@1640,3872.83 1900.39,4133.23 LS1.1@1900.39,4280 ; v1(4275,3555) 4540,3555 4561,3534 4561,3361 4708,3214 4708,2920 4720,2908 5008,2908 U5.12@5055,2955
  Bottom Layer w10: LS1.1@1900.39,4280 2165.39,4015 2625,4015 2715,3925 2815,3925 2831.52,3941.52 2922,3941.52 2928.52,3935 3158.92,3935 3262.42,3831.5 3320,3831.5 3341.5,3810 3341.5,3589.5 3352.5,3578.5 3571.98,3578.5 3665.48,3672 3950,3672 4067,3555 v1(4275,3555)
NetR1_1: R1.1 U2.4 U2.10 U10.10 U16.4 U16.10 | length 9125
  Top Layer w10: R1.1@1557.83,4740 1587,4740 2007,4320 2007,3865 1964,3822 1964,3364 1945,3345 1945,3106 2484,2567 3277.09,2567 3296.66,2586.57 3347.67,2586.57 3367.25,2567 3411,2567 3475.5,2631.5 3559.26,2631.5 3586.5,2604.26 3586.5,2565.74 3549.13,2528.37 3524.37,2528.37 3487,2491 3487,1413 U10.10@3525,1375 ; U2.4@5010,2390 5010,2190 U2.10@4910,2090 4910,1773 4960,1723 5094,1723 v1(5136,1681)
  Bottom Layer w10: U10.10@3525,1375 3584,1434 4001,1434 4035,1468 4439,1468 4463,1492 4912,1492 4937,1517 5300,1517 ; v1(5136,1681) 5300,1517 ; U16.4@5615,1475 5715,1375 U16.10@5915,1375 5868,1328 5566,1328 5377,1517 5300,1517
NetR2_1: R2.1 SW1.A U11.11 | length 2438.4
  Top Layer w10: R2.1@1932.17,2555 1932.17,2487.86 1892.32,2448.01 1892.32,2250.39 2144.61,2250.39 2195,2200 2195,1840 2281,1754 2371.94,1754 2650.47,1475.47 2859.53,1475.47 U11.11@3015,1320
  Bottom Layer w10: SW1.A@1632.83,2315.91 1871.93,2555 R2.1@1932.17,2555
NetR3_1: R3.1 SW2.A U11.12 | length 2050.7
  Top Layer w10: SW2.A@1957.83,2315.91 2080,2438.07 R3.1@2080,2532.83 2141.58,2594.41 2346.58,2594.41 2647,2293.99 2647,1720 2692,1675 2760,1675 U11.12@3015,1420
NetR4_1: R4.1 SW3.A U11.13 | length 1726.5
  Top Layer w10: R4.1@2285,2532.83 2285,2426.58 2281.42,2423 SW3.A@2281.42,2317.95 2580,2019.37 2580,1690.47 2695,1575.47 2794.53,1575.47 2995,1375 3034.53,1375 3059.53,1400 3059.53,1475.47 U11.13@3015,1520
NetR5_1: R5.1 SW5.A U11.2 | length 1968
  Top Layer w10: R5.1@1465,2575 1893,2147 1893,1911.37 SW5.A@1961.42,1842.95
  Bottom Layer w10: SW5.A@1961.42,1842.95 2019.37,1785 2590.47,1785 2670,1864.53 2760,1864.53 2774,1850.53 2774,1779 U11.2@2715,1720
NetR6_1: R6.1 SW6.A U11.3 | length 3404.8
  Top Layer w10: R6.1@1465,2825 1540,2750 1920,2750 1974,2696 1974,2415 1912.32,2353.32 1912.32,2270.39 2100,2270.39 ; SW6.A@2281.42,1842.95 2327,1888.53 2327,2186.39 2243,2270.39 2100,2270.39 ; U11.3@2715,1620 2701,1620 2616,1705 2616,2284.99 2326.58,2574.41 2243,2574.41 2243,2528 2089,2374 2089,2281.39 2100,2270.39
NetR7_1: R7.1 SW4.A U11.1 | length 1733
  Top Layer w10: R7.1@1467.17,2330 1548,2249.17 1548,1925.74 SW4.A@1632.83,1840.91
  Bottom Layer w10: SW4.A@1632.83,1840.91 1755.74,1718 2613,1718 U11.1@2715,1820
NetR8_2: R8.2 U8.4 U10.2 U13.4 | length 1454.3
  Bottom Layer w10: U10.2@3200,1675 3352,1523 3689.83,1523 R8.2@3730,1482.83 3777.17,1530 U13.4@4078.7,1530 4116.7,1492 4418.54,1492 4456.54,1530 U8.4@4523.7,1530
NetR9_1: R9.1 SW8.A U11.5 | length 1753.3
  Bottom Layer w10: R9.1@1467.17,1835 1585,1717.17 1585,1316 1600,1301 1889.47,1301 SW8.A@1956.42,1367.95 2008.47,1420 U11.5@2715,1420
NetR10_1: R10.1 SW9.A U11.10 | length 2031.6
  Top Layer w10: R10.1@1467.17,2095 1513,2049.17 1513,1842 1560,1795 1854.37,1795 SW9.A@2281.42,1367.95
  Bottom Layer w10: SW9.A@2281.42,1367.95 2379.37,1270 2735,1270 2785,1220 U11.10@3015,1220
NetR11_1: R11.1 SW7.A U11.4 | length 1461.6
  Top Layer w10: R11.1@1467.17,1615 1631.42,1450.75 SW7.A@1631.42,1367.95
  Bottom Layer w10: SW7.A@1631.42,1367.95 1783.47,1520 U11.4@2715,1520
NetR12_2: R12.2 U8.6 U10.4 U13.6 | length 1888.2
  Top Layer w10: U10.4@3200,1475 3142,1417 3142,1169 3180,1131 3568.83,1131 3637.83,1200 R12.2@3637.83,1280
  Bottom Layer w10: R12.2@3637.83,1280 3687.83,1330 U13.6@4078.7,1330 4116.7,1292 4439,1292 4477,1330 U8.6@4523.7,1330
NetR13_2: R13.2 U8.12 U10.6 U13.12 | length 3040.9
  Top Layer w10: U10.6@3200,1275 3225.88,1300.88 3240,1300.88 3278,1338.88 3278,2480.83 R13.2@3322.17,2525
  Bottom Layer w10: U10.6@3200,1275 3313,1275 3363,1325 3580,1325 3636,1381 4342.3,1381 U13.12@4391.3,1430 4438,1430 4476,1468 4798.3,1468 U8.12@4836.3,1430
NetR14_2: R14.2 U8.14 U10.8 U13.14 | length 3718.3
  Top Layer w10: R14.2@2867.17,2525 2867.17,2210.83 3258,1820 3258,1360 3223,1325 3194,1325 3162,1293 3162,1250 3175,1237 3463,1237 U10.8@3525,1175 ; v1(4294,1192) 4411,1192 4429,1210 4429,1592.3 U13.14@4391.3,1630
  Bottom Layer w10: U10.8@3525,1175 4277,1175 v1(4294,1192) ; U13.14@4391.3,1630 4429.3,1668 4661,1668 4699,1630 U8.14@4836.3,1630
NetR16_2: R16.2 U5.11 | length 1792.2
  Bottom Layer w10: U5.11@5155,2955 5273,3073 5500.47,3073 5512,3084.53 5962.53,3084.53 6124,3246 6245,3246 6245,3742.83 R16.2@6305,3802.83
NetR17_2: R17.2 X1.6 X2.1 | length 1940.4
  Top Layer w10: X1.6@2030,3260 2179,3409 2179,4069 X2.1@2480,4370
  Bottom Layer w10: X2.1@2480,4370 2607.83,4370 R17.2@2972.83,4735
NetR18_2: R18.2 X1.8 X2.2 | length 2975.8
  Top Layer w10: X1.8@2330,3160 2395,3225 2395,4185 X2.2@2480,4270 ; v1(2842,4220) 2856,4234 2856,4364 v1(2870,4378)
  Bottom Layer w10: X2.2@2480,4270 2639,4270 2689,4220 v1(2842,4220) ; v1(2870,4378) 2910,4338 3061,4338 3164,4235 3365,4235 3442,4312 3970.83,4312 R18.2@4012.83,4270
NetR19_2: R19.2 X2.4 X3.6 | length 3849.4
  Top Layer w10: v1(2095,3515) 2095,4070 2440,4415 2525,4415 ; X2.4@2480,4070 2525,4115 2525,4415 ; v1(2495,4445) 2525,4415
  Bottom Layer w10: X3.6@1830,3515 v1(2095,3515) ; v1(2495,4445) 2641,4445 2886,4690 2886,4720 2943,4777 3077,4777 3350,4504 4193.83,4504 R19.2@4252.83,4445
NetR20_2: R20.2 X2.5 X3.8 | length 4251.1
  Top Layer w10: v1(2881,3900) 2910,3929 2910,4312.07 2930,4332.07 2930,4600 2973.52,4643.52 4629.31,4643.52 R20.2@4785,4487.83
  Bottom Layer w10: X3.8@1530,3615 1885,3970 X2.5@2480,3970 2615,3970 2765,3820 2801,3820 v1(2881,3900)
NetTSW1_2: TSW1.2 U1.1 U3.1 U7.1 U10.11 U12.1 | length 10562.8
  Top Layer w10: U10.11@3525,1475 3833,1783 3833,2252 4010,2429 4010,2737 v1(4085,2812) ; U3.1@6090,3000 6090,3185 U12.1@6200,3295
  Bottom Layer w10: TSW1.2@2629.96,4735 2700.96,4806 4472,4806 4498,4780 4498,4680 4556,4622 6133,4622 6275,4480 6275,4360 6445,4190 6445,3575 6420,3550 6377,3550 6347,3580 6347,3840 6320,3867 6200,3867 6155,3822 6155,3340 U12.1@6200,3295 ; v1(4085,2812) 4088,2815 4441.51,2815 4445,2811.51 4639.51,2811.51 4652,2824 5409,2824 U7.1@5585,3000 5630,2955 6045,2955 U3.1@6090,3000 6139,2951 6546,2951 U1.1@6590,2995
NetTSW2_2: TSW2.2 U4.2 | length 2439.4
  Bottom Layer w10: TSW2.2@1200,3294.96 1265.04,3360 1908,3360 1963,3305 2463,3305 2465,3303 2880,3303 2980,3203 3445,3203 3463,3185 U4.2@3540,3185
NetU1_3: U1.3 U3.3 U6.2 U7.3 U8.2 U12.3 | length 4855.2
  Top Layer w10: U6.2@5030,1670 5085.63,1670 5264,1491.63 5264,1359.5 5300,1323.5 5361.5,1323.5 5460,1422 5460,2675 U7.3@5585,2800 5742.69,2642.31 5742.69,2560.38 5847.6,2455.47 5905,2455.47 5949.53,2500 5949.53,2659.53 U3.3@6090,2800 ; U12.3@6400,3295 6465,3360 6505,3360 6545,3320 6545,2840 U1.3@6590,2795
  Bottom Layer w10: U8.2@4523.7,1730 4688,1730 4748,1670 U6.2@5030,1670 ; U3.3@6090,2800 6215,2800 6264,2751 6546,2751 U1.3@6590,2795
NetU1_4: U1.4 U3.4 U6.3 U7.4 U8.9 U12.4 | length 5203.1
  Top Layer w10: U8.9@4836.3,1130 4874,1167.7 4874,1414 U6.3@5030,1570 ; v1(6390,1495) 6390,2030 6545.47,2185.47 6545.47,2597.88 ; U12.4@6500,3295 6525,2831.72 6549.3,2776.94 ; 6545.57,2597.88 cw(c6590,2595) 6550.13,2614.83 U1.4@6590,2695 6550.13,2775.17 ; 6549.3,2776.94 ccw(c6590,2795) 6550.13,2775.17 ; 6549.3,2776.94 ccw(c6590,2795) 6550.13,2775.17
  Bottom Layer w10: U8.9@4836.3,1130 4892.59,1130 4899.09,1123.5 5998.5,1123.5 6362.35,1487.35 6382.35,1487.35 v1(6390,1495) ; U7.4@5585,2700 5630,2655 6045,2655 U3.4@6090,2700 6139,2651 6546,2651 U1.4@6590,2695